# EAGLE board CapacitiveSoilMoistureSensor v32 (EAGLE 9.7.0)
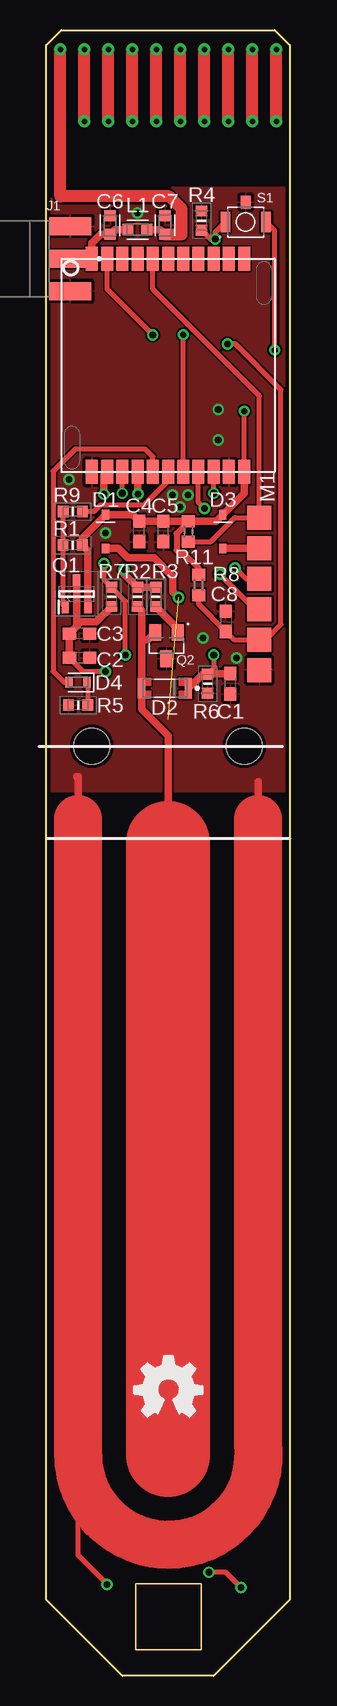
[diagram p0: board, top side]
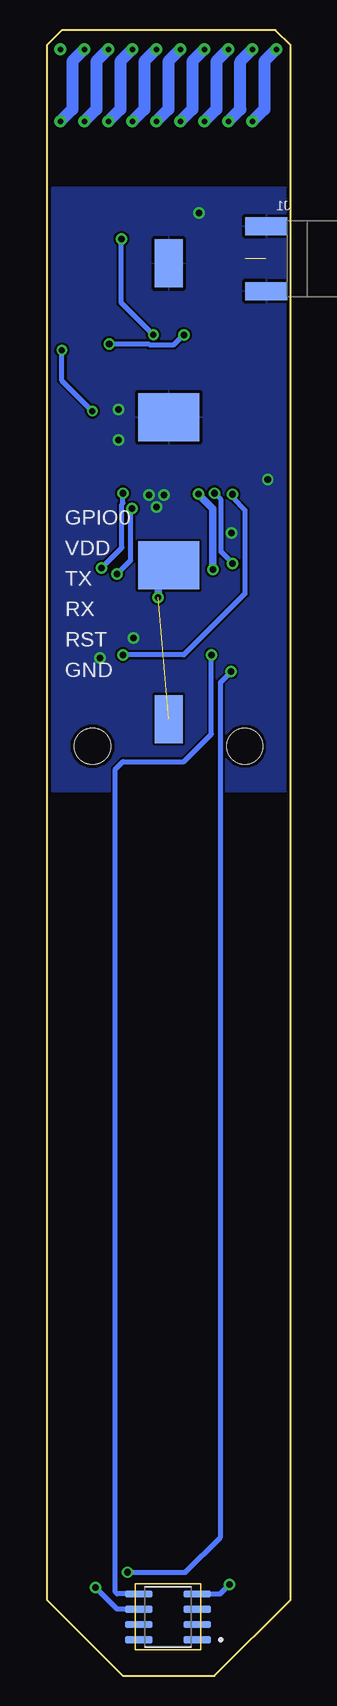
[diagram p1: board, bottom side, seen from below]

Size 20.32 x 137.16 mm. Coordinates in mm from the lower left corner, seen from the top.
Outline: 0,135.89 1.27,137.16 19.05,137.16 20.32,135.89 20.32,6.35 13.97,0 6.35,0 0,6.35 0,135.89
Copper layers (1*16): Top / Bottom
Stack-up Default Layer Stack: Top User Defined 0.035mm / Dielectric-1 User Defined 1.5mm / Bottom User Defined 0.035mm
Design rules "aisler_2_layer_simple": minimum track width 0.2mm, minimum drill 0.45mm, track to track 0.175mm, track to pad 0.175mm, pad to pad 0.175mm, via to via 0.175mm, smd to smd 0.175mm, copper to edge 0.3mm, drill to drill 0.25mm, minimum pad ring 0.2mm, minimum via ring 0.2mm, stop-mask expansion 0mil, vias tented up to drill 0mil, thermal gap 10mil
Holes 3 mm at 3.81,77.47 16.51,77.47

## Footprints (pad centres in the part's own frame; a part is rotated, then mirrored left to right if it is on the bottom)
C0603 = smd 1.1 x 1: 1 -0.85,0; 2 0.85,0
CAPC1608X85 = smd 0.921 x 0.97: 1 -0.775,0; 2 0.775,0
SOD-323 = smd 0.8 x 0.6: P$1 -0.4,0; P$2 2.4,0
DIO_LL4148 = smd 0.6 x 1.65: A 1.95,0; C -1.95,0
LEDC1608X80N_FLAT-R = smd 0.612 x 0.912: A 0.75,0; C -0.75,0
TP20SQ = smd 2 x 2: TP 0,0
RFSOLUTIONS_CON-SMA-EDGE-S = smd 3.5 x 1.5: 1 0,0; G1 0,2.7; G2 0,-2.7 | smd 3.5 x 1.5 bottom: G3 0,2.7; G4 0,-2.7
INDC1608X95N = smd 0.9 x 0.97: 1 -0.785,0 | smd 0.933 x 0.97: 2 0.769,0
HTCC-AM01 = smd 2 x 1: 1 0,0; 2 0,1.27; 3 0,2.54; 4 0,3.81; 5 0,5.08; 6 0,6.35; 7 0,7.62; 8 0,8.89; 9 0,10.16; 10 0,11.43; 11 0,12.7; 12 17.78,0; 13 17.78,1.27; 14 17.78,2.54; 15 17.78,3.81; 16 17.78,5.08; 17 17.78,6.35; 18 17.78,7.62; 19 17.78,8.89; 20 17.78,10.16; 21 17.78,11.43; 22 17.78,12.7
SOT95P230X110-3N = smd 1.05 x 0.6: 1 -1.1,0.95; 2 -1.1,-0.95; 3 1.1,0
SOT95P240X120-3N = smd 1 x 1.4: 1 -0.95,-1.1; 2 0.95,-1.1; 3 0,1.1
RESC1608X55N = smd 0.9 x 0.95: 1 -0.8,0; 2 0.8,0
R0603 = smd 1 x 1.1: 1 -0.85,0; 2 0.85,0
SW_B3U-1100P = smd 0.8 x 1.7: 1 1.7,0; 2 -1.7,0 | smd 0.8 x 1.1: 3 0,-1.65
SOIC127P600X175-8N = smd 2.3 x 0.6: 1 -2.455,1.905; 2 -2.455,0.635; 3 -2.455,-0.635; 4 -2.455,-1.905; 5 2.455,-1.905; 6 2.455,-0.635; 7 2.455,0.635; 8 2.455,1.905
KEYSTONE53 = smd 4 x 5.1: P$1 0,0 | smd 4 x 2.34: P$2 -12.8,0

## Placement (x,y rotation side)
C1  1nF  [C0603]  15.37,82.68 90 top
C2  1uF  [C0603]  2.79,84.84 180 top
C3  10uF  [C0603]  2.79,86.87 180 top
C4  1uF  [C0603]  7.75,95.38 90 top
C5  10uF  [C0603]  9.78,95.38 90 top
C6  [CAPC1608X85]  5.33,120.9 90 top
C7  [CAPC1608X85]  9.91,120.9 90 top
C8  2.2uF  [C0603]  14.99,87.88 270 top
D1  SOD-323  [SOD-323]  4.95,94.36 90 top
D2  LL4148  [DIO_LL4148]  9.91,82.3 180 top
D3  SOD-323  [SOD-323]  14.73,94.36 90 top
D4  LED_RED  [LEDC1608X80N_FLAT-R]  2.67,82.8 180 top
GND  TPTP20SQ  [TP20SQ]  17.78,83.82 0 top
GPIO0  TPTP20SQ  [TP20SQ]  17.78,96.52 0 top
J1  CON-SMA-EDGE-S  [RFSOLUTIONS_CON-SMA-EDGE-S]  2.03,118.11 0 top
L1  [INDC1608X95N]  7.62,120.52 0 top
LOGO1  LOGO-OSHW-FILLX0200-NT  [OSHW_FILLX200_NOTEXT]  7.37,21.59 0 top
M1  HTCC-AM01  [HTCC-AM01]  3.81,118.11 270 top
Q1  PMV50XPR  [SOT95P230X110-3N]  2.54,90.17 90 top
Q2  MMBT3906  [SOT95P240X120-3N]  10.03,85.85 180 top
R1  10k  [RESC1608X55N]  2.21,94.23 0 top
R2  150k  [RESC1608X55N]  7.62,89.92 270 top
R3  10k  [RESC1608X55N]  9.14,89.92 270 top
R4  10k  [RESC1608X55N]  12.95,121.29 90 top
R5  150  [RESC1608X55N]  2.67,80.9 180 top
R6  1M  [RESC1608X55N]  13.46,82.68 90 top
R7  4.7k  [RESC1608X55N]  5.46,89.92 270 top
R8  10K  [R0603]  12.71,90.92 270 top
R9  1k  [RESC1608X55N]  2.23,97.03 180 top
R11  10K  [R0603]  11.86,95.35 270 top
RST  TPTP20SQ  [TP20SQ]  17.78,86.36 0 top
RX  TPTP20SQ  [TP20SQ]  17.78,88.9 0 top
S1  B3U-1100P  [SW_B3U-1100P]  16.64,121.16 180 top
TX  TPTP20SQ  [TP20SQ]  17.78,91.44 0 top
U1  DS18B20Z  [SOIC127P600X175-8N]  10.22,4.92 180 bottom
U$3  KEYSTONE53  [KEYSTONE53]  10.16,92.54 90 bottom
U$4  KEYSTONE53  [KEYSTONE53]  10.16,104.9 270 bottom
VDD  TPTP20SQ  [TP20SQ]  17.78,93.98 0 top

## Library data of the parts
C1-C5 C8 = rcl; SPICEPREFIX: C
C6 C7 = Capacitor; CATEGORY: Capacitor
D1 D3 M1 R2 R3 R5 R9 = HTCC-AM01
D2 = SnapEDA Library; MANUFACTURER: On Semiconductor; MAXIMUM_PACKAGE_HEIGHT: 1.5mm; PARTREV: 1.8; STANDARD: Manufacturer recommendations
D4 = LED; CATEGORY: LED; COLOR: RED; DESCRIPTION: CHIP LED FLAT; SUB-CATEGORY: CHIP; TYPE: FLAT_TOP
GND GPIO0 RST RX TX VDD = testpad
J1 = CON-SMA-EDGE-S; MANUFACTURER: RF Solutions; MAXIMUM_PACKAGE_HEIGHT: 6.35mm; PARTREV: 1; STANDARD: Manufacturer Recommendations
L1 = Inductor; CATEGORY: Inductor; SUB-CATEGORY: Fixed
LOGO1 = logo; PARTNO: DNP
Q1 = HTCC-AM01; DESCRIPTION: NEXPERIA - PMV50XPR - MOSFET, P-CH, -20V, -3.6A, TO236AB-3; HEIGHT: 1.1mm; MANUFACTURER_NAME: Nexperia; MANUFACTURER_PART_NUMBER: PMV50XPR; MOUSER_PART_NUMBER: 771-PMV50XPR; MOUSER_PRICE-STOCK: https://www.mouser.co.uk/ProductDetail/Nexperia/PMV50XPR?qs=%252BRKXB2WKlSc7VldGLKM90g%3D%3D
Q2 = SnapEDA Library; MANUFACTURER: Fairchild Semiconductor
R1 R4 R6 R7 = HTCC-AM01; DESCRIPTION: Thick Film Resistors - SMD 10K OHM 1% 1/4W TC100; HEIGHT: 0.55mm; MANUFACTURER_NAME: Bourns; MANUFACTURER_PART_NUMBER: CMP0603AFX-1002ELF; MOUSER_PART_NUMBER: 652-CMP0603AFX-1002L; MOUSER_PRICE-STOCK: https://www.mouser.co.uk/ProductDetail/Bourns/CMP0603AFX-1002ELF?qs=TiOZkKH1s2Q14lKL9rbzLg%3D%3D
R8 R11 = rcl; SPICEPREFIX: R
S1 = SnapEDA Library; MANUFACTURER: Omron
U1 = DS18B20Z-FLIP; MANUFACTURER: Maxim Integrated; PARTREV: 5; STANDARD: IPC7351B
U$3 U$4 = domsensorv06

## Nets
ADC: C1.2 D2.C M1.13 R6.2
ANT: C6.1 J1.1 L1.1 M1.1
GND: C1.1 C2.1 C3.1 C4.1 C5.1 C6.2 C7.2 C8.1 GND.TP J1.G1 J1.G2 J1.G3 J1.G4 M1.12 M1.21 Q2.3 R4.2 R5.2 R6.1 S1.3 U1.4 U$4.P$1 U$4.P$2
GPIO0: GPIO0.TP M1.5 R11.2
GPIO1: M1.14 R7.1 U1.5
GPIO2: M1.15 R2.1 R3.1
GPIO3: D4.A M1.16
GPIO4: M1.3
GPIO5: M1.4
GPIO6: M1.17 R9.1
GPIO7: M1.18 R4.1 S1.1
N$1: Q1.1 R1.1 R9.2
N$3: Q2.1 R3.2
N$4: D4.C R5.1
N$5: D2.A Q2.2 R2.2
PCB-ANTENNA: C7.1 L1.2
RST: C8.2 M1.2 R8.2 RST.TP
RX: M1.19 RX.TP
SCL: M1.7
SDA: M1.6
TX: M1.20 TX.TP
V+: D1.P$1 U$3.P$1 U$3.P$2
V-PROG: D3.P$1 VDD.TP
VDD: C4.2 C5.2 D1.P$2 D3.P$2 M1.22 Q1.2 R1.2 R8.1 R11.1 S1.2
VEXT: C2.2 C3.2 Q1.3 R7.2 U1.6

## Tracks (layer width: path | path; a pad name or v marks a point on that pad's centre or on a via)
ADC  (via drill 0.55 pad 0.8)
  Top 0.406: v13.97,85.09 13.97,83.98 13.51,83.53
  Top 0.61: D2.C 13.04,83.48 R6.2 13.51,83.53 C1.2 | M1.13 4.83,100.08 v4.83,98.48
  Bottom 0.406: v13.97,85.09 8.89,85.09 3.81,90.17 3.81,97.16 4.83,98.17 v4.83,98.48
ANT  (1 unrouted)
  Top 0.61: M1.1 3.81,119.38 4.56,120.13 C6.1 5.73,120.52 L1.1
GND  (via drill 0.55 pad 0.8)
  Top 0.406: v5.08,7.62 2.66,10.04 2.66,18.46
  Top 0.61: 2.66,71.43 2.66,74.93 2.54,74.93 | 17.66,71.43 17.66,74.52
  Top 4: 17.66,71.43 17.66,19.4 arc-187 2.66,18.46 2.66,71.43
  Bottom 0.406: U1.4 5.87,6.83 v5.08,7.62
  other vias: 7.62,121.92 1.9,99.7 11.81,98.43 10.54,98.43 11.18,97.41 13.08,86.49 15.87,84.84 14.35,103 14.35,105.54 4.94,95.25
  pour Top: -1.27,73.66 21.59,73.66 21.59,124.08 -1.27,124.08
  pour Bottom: -1.27,73.66 21.59,73.66 21.59,124.08 -1.27,124.08
GPIO0
  Top 0.406: M1.5 8.89,115.57 17.78,106.68 GPIO0.TP 15.73,96.52 13.71,94.5 R11.2
GPIO1  (via drill 0.55 pad 0.8)
  Top 0.406: v6.35,98.55 M1.14 | v4.83,92.7 4.83,91.34 R7.1 6.6,89.57 v6.6,85.09
  Bottom 0.406: v4.83,92.7 4.83,92.72 5.79,93.68 5.79,98 v6.35,98.55 | U1.5 14.45,6.83 14.6,6.99 14.6,75.57 13.97,76.2 8.89,76.2 6.6,78.49 v6.6,85.09
GPIO2  (via drill 0.55 pad 0.8)
  Top 0.61: R3.1 R2.1 6.48,91.86 v6.48,92.2 | M1.15 7.62,98.55 v7.67,98.5
  Bottom 0.61: v6.48,92.2 6.48,97.28 7.67,98.48 v7.67,98.5
GPIO3
  Top 0.406: M1.16 8.89,101.6 8.25,102.23 2.41,102.23 0.58,100.41 0.58,83.72 1.49,82.8 D4.A
GPIO6
  Top 0.406: M1.17 10.16,100.2 10.02,100.07 10.02,99.43 8.13,97.54 4.5,97.54 3.98,97.03 R9.1
GPIO7  (via drill 0.5, 0.55 pad 0.8)
  Top 0.406: M1.18 v11.43,111.76 | 12.99,120.48 R4.1 13.68,119.76 v14.1,119.76 14.1,120.32 S1.1
  Bottom 0.406: v11.43,111.76 14.1,114.43 v14.1,119.76
N$1
  Top 0.406: R9.2 1.41,97.01 R1.1 1.41,89.25 Q1.1
N$3
  Top 0.61: R3.2 10.98,87.28 Q2.1
N$4
  Top 0.406: D4.C 3.47,82.75 R5.1
N$5
  Top 0.61: R2.2 7.96,88.78 7.96,86.36 | 7.96,86.36 D2.A 7.96,80.56 10.16,78.36 10.16,69.43 | Q2.2 8.49,86.36 7.96,86.36
  Top 7: 10.16,18.43 10.16,69.43
PCB-ANTENNA  (via drill 0.45 pad 1)
  Top 0.61: L1.2 9.51,120.52 C7.1
  Top 1: v1.19,135.54 1.19,123.29 10.26,123.29 11.29,122.25 11.29,120.13 C7.1 | v3.19,129.54 v3.19,135.54 | v5.19,129.54 v5.19,135.54 | v7.19,129.54 v7.19,135.54 | v9.19,129.54 v9.19,135.54 | v11.19,129.54 v11.19,135.54 | v13.19,129.54 v13.19,135.54 | v15.19,129.54 v15.19,135.54 | v17.19,129.54 v17.19,135.54 | v19.19,129.54 v19.19,135.54
  Bottom 1: v1.19,135.54 2.19,134.54 2.19,130.54 v3.19,129.54 | v3.19,135.54 4.19,134.54 4.19,130.54 v5.19,129.54 | v5.19,135.54 6.19,134.54 6.19,130.54 v7.19,129.54 | v7.19,135.54 8.19,134.54 8.19,130.54 v9.19,129.54 | v9.19,135.54 10.19,134.54 10.19,130.54 v11.19,129.54 | v11.19,135.54 12.19,134.54 12.19,130.54 v13.19,129.54 | v13.19,135.54 14.19,134.54 14.19,130.54 v15.19,129.54 | v15.19,135.54 16.19,134.54 16.19,130.54 v17.19,129.54 | v17.19,135.54 18.19,134.54 18.19,130.54 v19.19,129.54
RST  (via drill 0.55 pad 0.8)
  Top 0.406: R8.2 12.71,89.31 C8.2 15.66,86.36 RST.TP 18.29,86.36 19.56,87.63 19.56,107.19 15.75,111 v15.11,111 | v8.89,111.76 5.08,115.57 M1.2
  Bottom 0.406: v15.11,111 11.84,111 11.77,110.93 9.72,110.93 v8.89,111.76
RX  (via drill 0.55 pad 0.8)
  Top 0.406: RX.TP 17.4,88.9 v14.48,91.82 | v13.21,97.28 12.7,97.79 M1.19
  Bottom 0.406: v14.48,91.82 13.33,92.96 13.33,97.03 13.21,97.16 v13.21,97.28
TX  (via drill 0.55 pad 0.8)
  Top 0.406: TX.TP 16.64,91.44 v15.75,92.33 | v13.97,98.55 M1.20
  Bottom 0.406: v13.97,98.55 13.97,97.73 14.06,97.64 14.06,94.02 v15.75,92.33
V+  (via drill 0.55 pad 0.8)  (1 unrouted)
  Top 0.61: D1.P$1 6.02,93.96 6.81,93.16 8.99,93.16 10.56,91.6 10.56,90.36 v11.05,89.87
  Bottom 0.61: v11.05,89.87 11.05,91.65 U$3.P$1
V-PROG
  Top 0.61: VDD.TP 17.76,93.96 D3.P$1
VDD  (via drill 0.5)
  Top 0.406: M1.22 v16.51,105.41 | v19.05,110.49 19.05,120.45 S1.2
  Top 0.508: 11.43,96.2 11.43,95.74 10.87,95.18 10.87,93.83 11.13,93.57 11.43,93.57 12.71,92.29 R8.1
  Top 0.61: M1.22 16.51,98.54 D3.P$2 14.17,96.2 R11.1 11.43,96.2 9.8,96.2 C5.2 C4.2 7.21,96.76 D1.P$2 3.01,94.82 R1.2 3.49,93.76 Q1.2
  Bottom 0.406: v16.51,105.41 19.05,107.95 v19.05,110.49
VEXT  (via drill 0.55 pad 0.8)
  Top 0.406: v16.26,7.37 14.99,8.64 v13.59,8.64 | v4.95,83.69 3.09,83.69 C2.2
  Top 0.61: Q1.3 2.54,87.46 | 2.54,87.46 C3.2 C2.2 | 2.54,87.46 2.61,87.54 2.61,87.57 2.9,87.85 4.19,87.85 R7.2
  Bottom 0.406: U1.6 14.45,5.56 v16.26,7.37 | v13.59,8.64 8.76,8.64 5.84,11.56 5.84,82.81 v4.95,83.69